# Altium PCB warship_demo_PCB.PcbDoc (part 1 of 3)
Units mm, origin at the board's own origin, x right, y up, seen from the top; angles counter-clockwise.
Board outline 160.38 x 121.38 mm, 2 copper layers (Top Layer, Bottom Layer); 272 components, 249 nets, 1200 pads, 295 vias.
Unrouted connection lines stored in the file: 2.
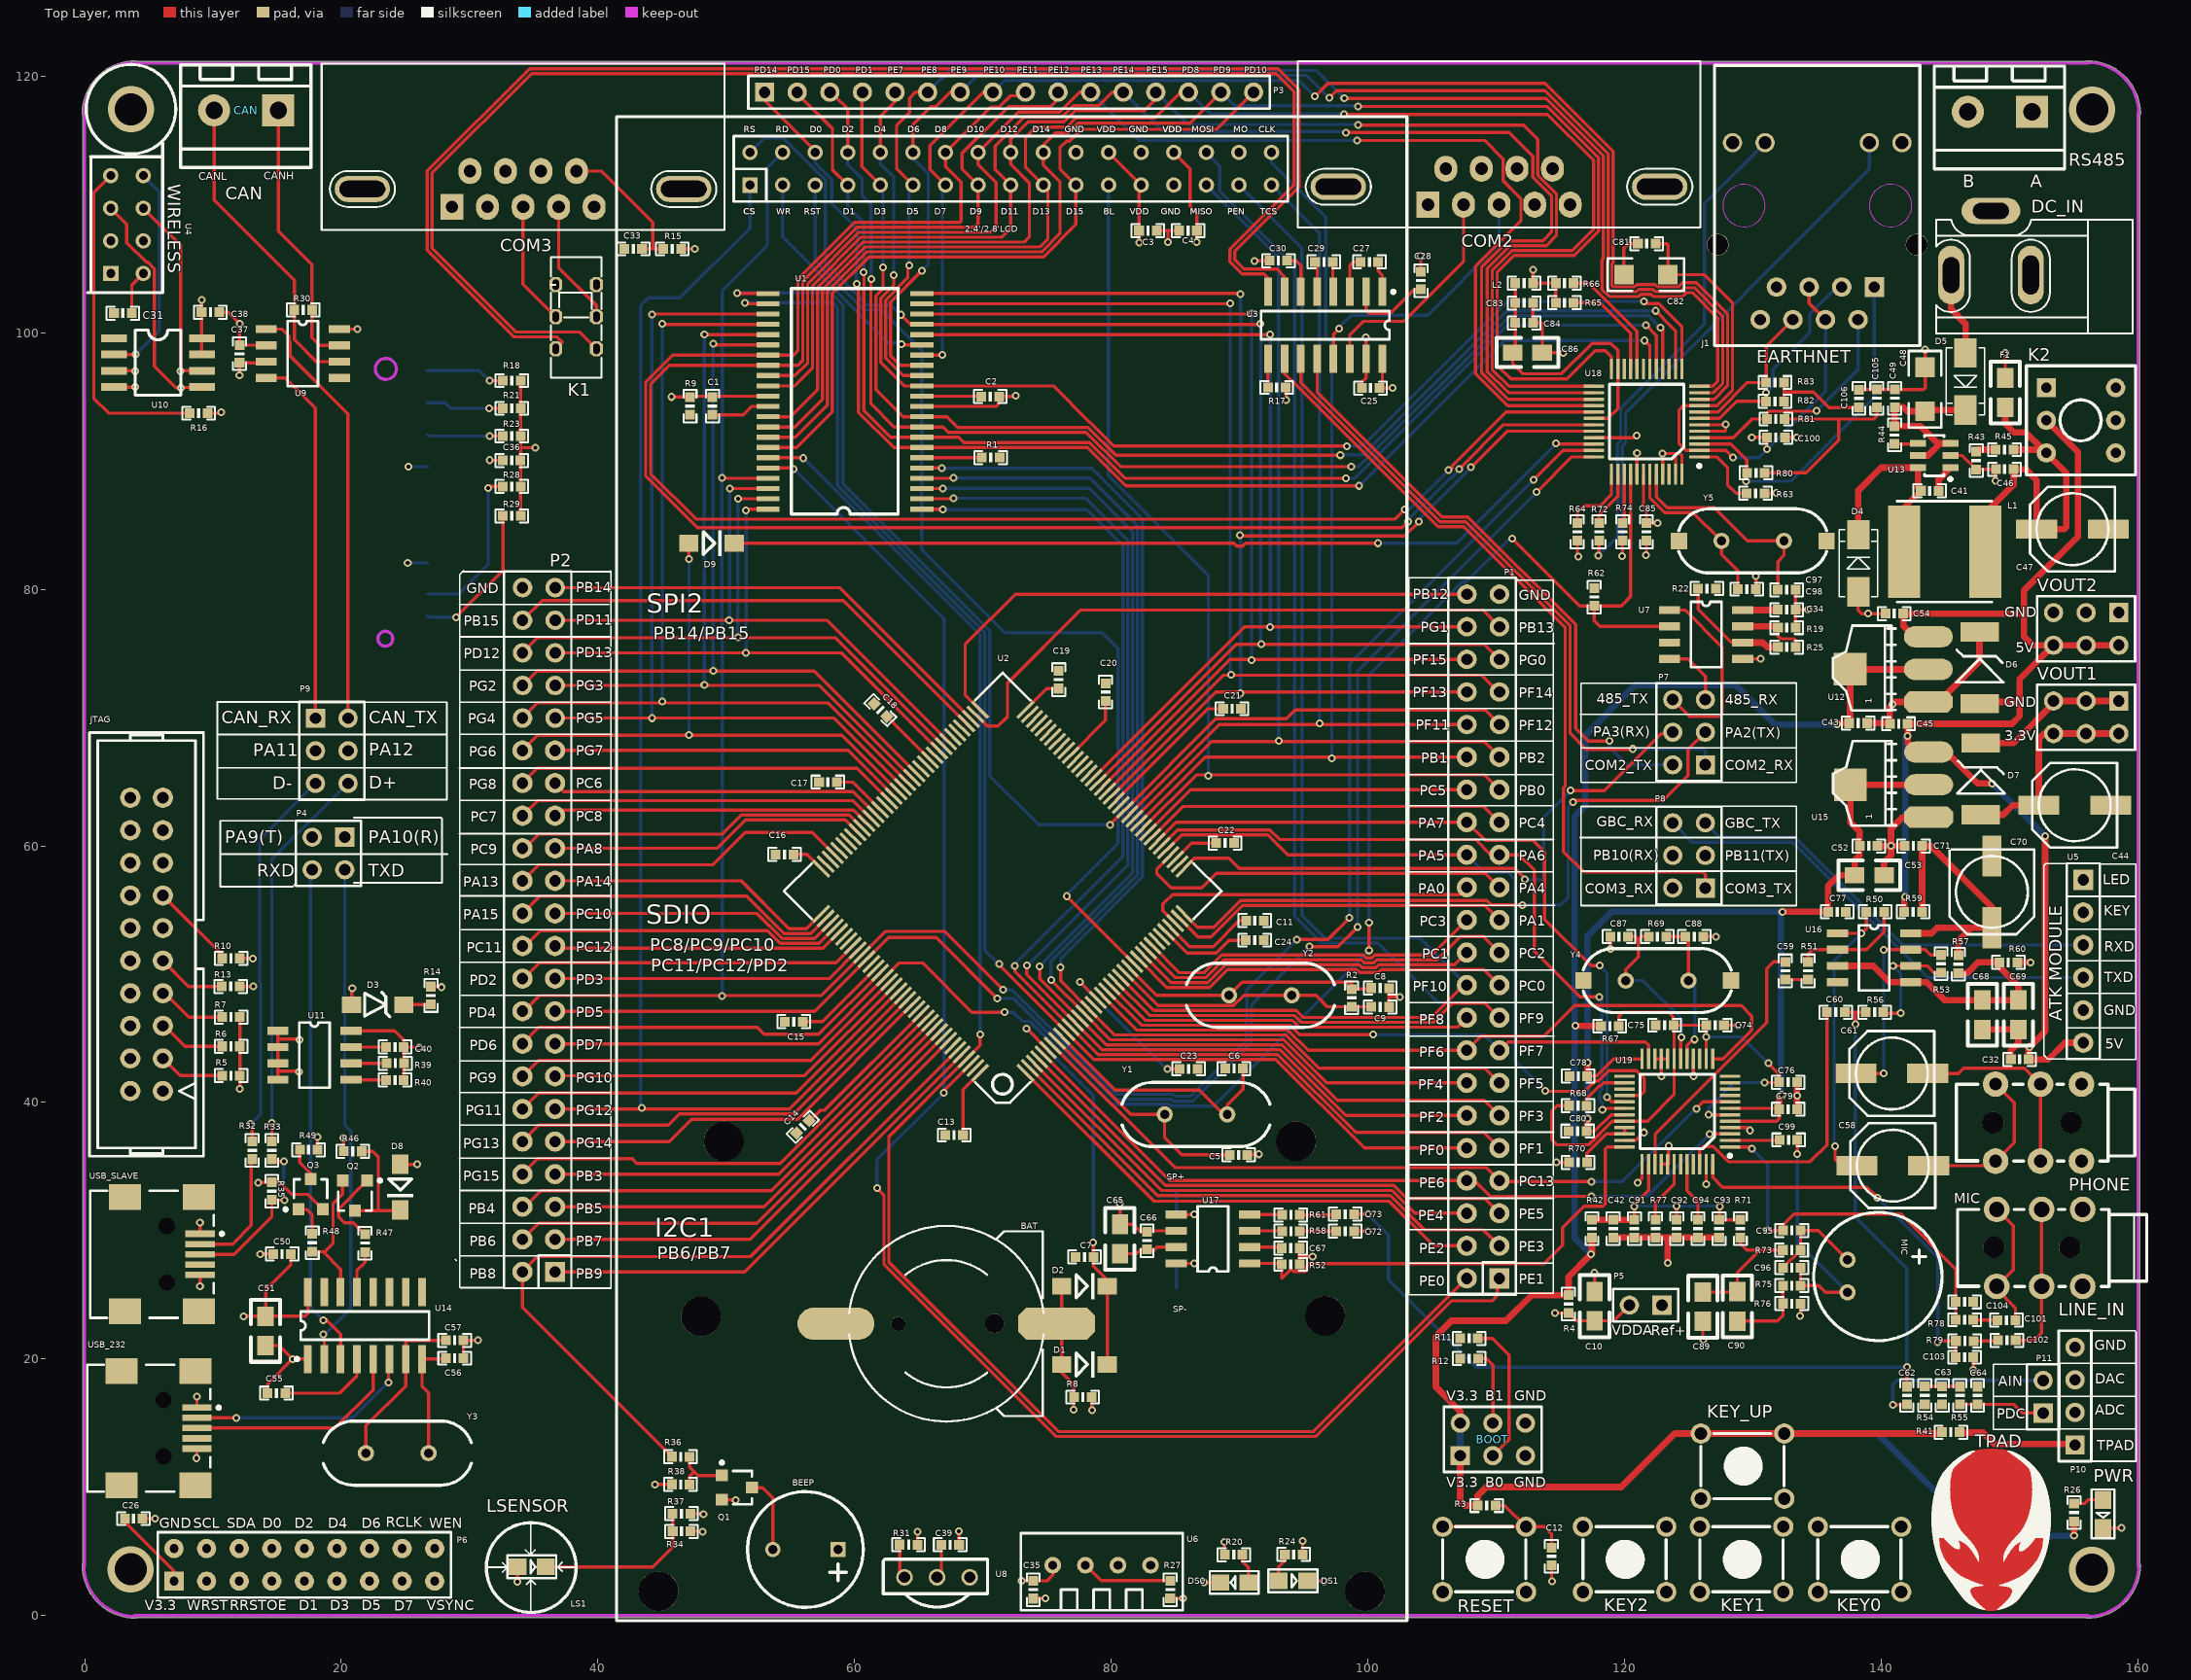
[diagram p0: Top Layer view]
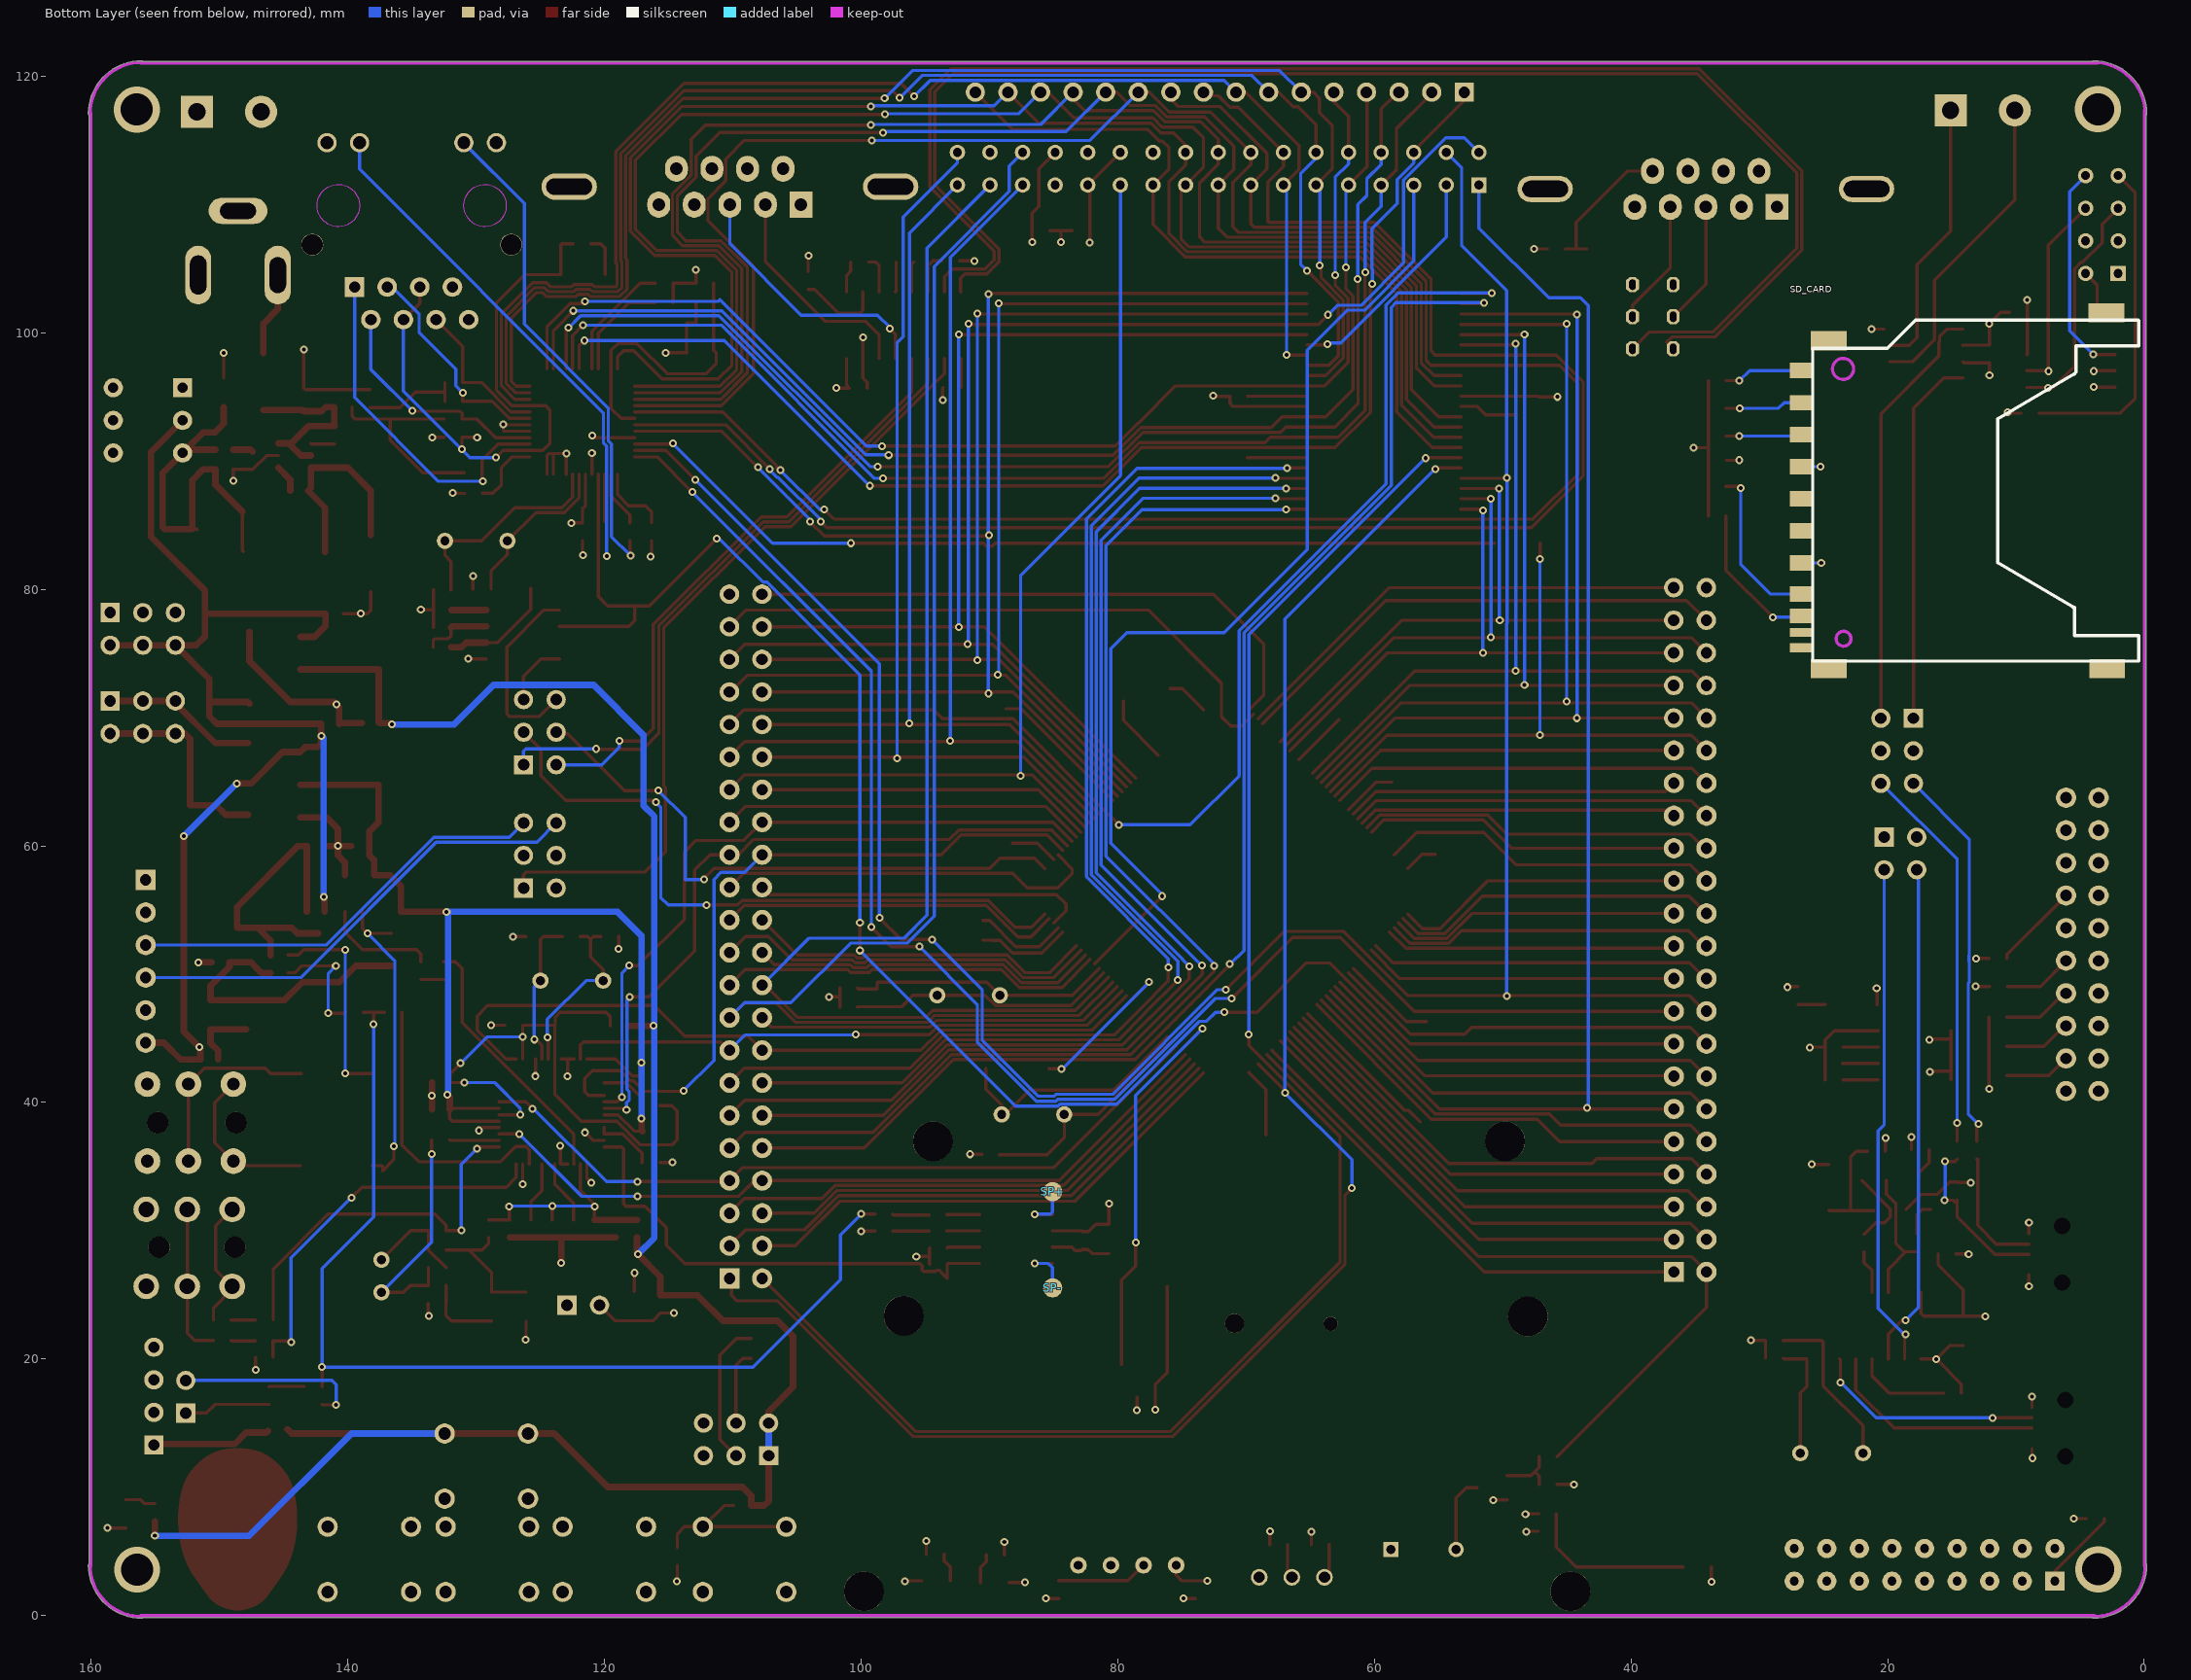
[diagram p1: Bottom Layer view, seen from below]

## Layer stack, top to bottom
Top Solder: solder mask 0.0102, Solder Resist, Dk 3.5
Top Layer: signal copper 0.0356
Dielectric 1: dielectric 0.32, FR-4, Dk 4.8
Bottom Layer: signal copper 0.0356
Bottom Solder: solder mask 0.0102, Solder Resist, Dk 3.5

## Board outline
-0.19,3.937 cw(c-0.063,3.937) -0.127,4.047 -0.127,116.953 cw(c-0.063,117.063) -0.19,117.063 cw(c3.937,117.063) 3.937,121.19 cw(c3.937,121.063) 4.047,121.127 155.953,121.127 cw(c156.063,121.063) 156.063,121.19 cw(c156.063,117.063) 160.19,117.063 cw(c160.063,117.063) 160.127,116.953 160.127,4.047 cw(c160.063,3.937) 160.19,3.937 cw(c156.063,3.937) 156.063,-0.19 cw(c156.063,-0.063) 155.953,-0.127 4.047,-0.127 cw(c3.937,-0.063) 3.937,-0.19 cw(c3.937,3.937)

## Design rules (kind name [scope] priority, off if disabled: settings)
Clearance [All] p1: gap=0.127 ignorepadtopadclearanceinfootprint=TRUE except(0: Arc-Hole Track-Hole SMDPad-Hole THPad-Hole Via-Hole Fill-Hole Poly-Hole Region-Hole Text-Hole; 0.051: Arc-SMDPad Arc-THPad Track-SMDPad Track-THPad SMDPad-SMDPad SMDPad-THPad THPad-THPad)
PlaneConnect [All] p1: planeconnectstyle=Direct reliefexpansion=0.508 reliefentries=4 reliefconductorwidth=0.254 reliefairgap=0.254
PolygonConnect [All] p1: connectstyle=Direct reliefconductorwidth=0.254 reliefentries=4 polygonreliefangle="90 Angle" airgapwidth=0.254
RoutingVias [All] p1: holewidth=0.305 width=0.61 viastyle="Through Hole" minholewidth=0.152 minwidth=0.152 maxholewidth=0.508 maxwidth=0.762
SolderMaskExpansion [All] p1: expansion=0.102
Width power [InNetClass('PWR')] p1: maxlimit=1.27 minlimit=0.254 preferedwidth=0.508
Width signal [All] p2: maxlimit=0.762 minlimit=0.254 preferedwidth=0.254
29 further rules are at their usual default settings.

## Classes and differential pairs
component class warship_demo_4: C41 C42 C43 C44 C45 C46 C47 C48 C49 C50 C51 C52 C53 C54 C55 C56 C57 D4 D5 D6 D7 D8 DC_IN F1 K2 L1 Q2 Q3 R42 R43 R44 R45 R46 R47 R48 R49 U12 U13 U14 U15 USB_232 VOUT1 VOUT2 Y3
component class warship_demo_3: BEEP C25 C26 C27 C28 C29 C30 C31 C32 C33 C34 C35 C36 C37 C38 C39 C40 CAN COM2 COM3 D3 DS0 DS1 K1 KEY0 KEY1 KEY2 KEY_UP LS1 P6 P7 P8 P9 P10 PWR Q1 R14 R15 R16 R17 R18 R19 R20 R21 R22 R23 R24 R25 R26 R27 R28 R29 R30 R31 R32 R33 R34 R35 R36 R37 R38 R39 R40 R41 RS485 SD_CARD TPAD U3 U4 U5 U6 U7 U8 U9 U10 U11 USB_SLAVE
component class warship_demo_2: 2.4'/2.8'LCD BAT BOOT C1 C2 C3 C4 C5 C6 C7 C8 C9 C10 C11 C12 C13 C14 C15 C16 C17 C18 C19 C20 C21 C22 C23 C24 D1 D2 JTAG P1 P2 P3 P4 P5 R1 R2 R3 R4 R5 R6 R7 R8 R9 R10 R11 R12 R13 RESET U1 U2 Y1 Y2
component class warship_demo_1: C58 C59 C60 C61 C62 C63 C64 C65 C66 C67 C68 C69 C70 C71 C72 C73 C74 C75 C76 C77 C78 C79 C80 C81 C82 C83 C84 C85 C86 C87 C88 C89 C90 C91 C92 C93 C94 C95 C96 C97 C98 C99 C100 C101 C102 C103 C104 C105 C106 D9 J1 L2 LINE_IN MIC P11 PHONE R50 R51 R52 R53 R54 R55 R56 R57 R58 R59 R60 R61 R62 R63 R64 R65 R66 R67 R68 R69 R70 R71 R72 R73 R74 R75 R76 R77 R78 R79 R80 R81 R82 R83 SP+ SP- U16 U17 U18 U19 Y4 Y5
net class PWR: AVDD CVDD GND NetC41_1 NetC41_2 NetC48_2 NetD5_1 VBTN VCC2.5 VCC3.3 VCC3.3M VCC5 VDDAMP VREF+ VUSB

## Components (designator, comment, footprint, x,y, rotation, side; value= is the part's Value field where it differs from the comment)
2.4'/2.8'LCD "TFT_LCD" db2*17-4.3 51.843,111.5 r0 top locked
BAT "BATT" BATM 67.141,22.758 r90 top locked
BEEP "BEEP" BELL-5 58.699,5.156 r180 top
BOOT "Header 3X2" HDR2X3 107.188,12.471 r0 top
C1 "104" 0603P 48.92,94.285 r90 top
C2 "104" 0603P 70.561,95.021 r180 top
C3 "104" 0603P 82.855,107.95 r180 top
C4 "104" 0603P 85.979,107.95 r180 top
C5 "10" 0603P 89.916,35.916 r180 top
C6 "10" 0603P 89.56,42.647 r0 top
C7 "104" 0603P 77.902,27.965 r0 top
C8 "22" 0603P 100.952,48.919 r180 top
C9 "22" 0603P 100.94,47.447 r0 top
C10 "10uF" 0805 117.654,25.273 r270 top
C11 "104" 0603P 91.186,54.178 r0 top
C12 "104" 0603P 114.3,4.623 r270 top
C13 "104" 0603P 67.742,37.465 r0 top
C14 "104" 0603P 55.956,38.1 r45 top
C15 "104" 0603P 55.245,46.304 r0 top
C16 "104" 0603P 54.534,59.334 r0 top
C17 "104" 0603P 57.912,64.973 r0 top
C18 "104" 0603P 62.001,70.587 r315 top
C19 "104" 0603P 75.897,72.962 r270 top
C20 "104" 0603P 79.553,71.984 r270 top
C21 "104" 0603P 89.408,70.688 r180 top
C22 "104" 0603P 88.875,60.223 r180 top
C23 "104" 0603P 86.03,42.621 r180 top
C24 "104" 0603P 91.186,52.654 r180 top
C25 "104" 0603P 100.203,95.682 r0 top
C26 "104" 0603P 3.81,7.569 r0 top
C27 "104" 0603P 100.101,105.512 r180 top
C28 "104" 0603P 104.115,104.064 r90 top
C29 "104" 0603P 96.571,105.512 r180 top
C30 "104" 0603P 93.015,105.613 r180 top
C31 "104" 0603P 2.972,101.524 r0 top
C32 "104" 0603P 150.774,43.358 r0 top
C33 "104" 0603P 42.748,106.528 r180 top
C34 "104" 0603P 132.626,78.41 r180 top
C35 "104" 0603P 73.914,2.032 r270 top
C36 "104" 0603P 33.274,90.043 r180 top
C37 "104" 0603P 12.065,98.349 r270 top
C38 "104" 0603P 9.804,101.6 r180 top
C39 "104" 0603P 67.437,5.537 r0 top
C40 "104" 0603P 24.181,44.323 r180 top
C41 "103" 0603P 143.764,87.681 r0 top
C42 "104" 0603P 119.099,30.162 r90 top
C43 "104" 0603P 138.201,69.571 r180 top
C44 "220uF" CC6.56.5 155.067,63.17 r0 top locked
C45 "104" 0603P 141.351,69.52 r0 top
C46 "104" 0603P 149.606,89.357 r0 top
C47 "220uF" CC6.56.5 154.889,84.684 r0 top
C48 "10uF" 1206 143.408,97.307 r270 top
C49 "104" 0603P 141.046,94.894 r270 top
C50 "104" 0603P 15.38,28.192 r180 top
C51 "10uF" 0805 14.097,21.057 r90 top
C52 "104" 0603P 139.014,59.995 r180 top
C53 "10uF" 0805 140.208,57.707 r180 top
C54 "104" 0603P 141.008,78.107 r0 top
C55 "104" 0603P 14.935,17.348 r0 top
C56 "22" 0603P 28.829,20.066 r180 top
C57 "22" 0603P 28.829,21.463 r180 top
C58 "220uF" CC6.56.5 140.894,35.077 r0 top
C59 "1uF" 0603P 132.51,50.267 r90 top
C60 "1uF" 0603P 136.455,47.039 r180 top
C61 "220uF" CC6.56.5 140.818,42.266 r0 top
C62 "1uF" 0603P 141.988,17.17 r270 top
C63 "102" 0603P 144.743,17.17 r90 top
C64 "101" 0603P 147.498,17.17 r270 top
C65 "10uF" 0805 80.672,30.505 r270 top
C66 "104" 0603P 82.779,29.235 r90 top
C67 "1uF" 0603P 93.98,28.651 r180 top
C68 "10uF" 0805 147.879,45.695 r90 top
C69 "10uF" 0805 150.673,45.695 r90 top
C70 "220uF" CC6.56.5 148.615,56.413 r90 top
C71 "104" 0603P 142.494,59.995 r180 top
C72 "104" 0603P 98.222,29.972 r180 top
C73 "1uF" 0603P 98.222,31.293 r180 top
C74 "104" 0603P 127.051,46.025 r180 top
C75 "104" 0603P 123.114,46.025 r0 top
C76 "104" 0603P 132.74,41.58 r180 top
C77 "104" 0603P 136.55,54.864 r180 top
C78 "104" 0603P 116.383,42.062 r0 top
C79 "104" 0603P 132.74,39.472 r180 top
C80 "104" 0603P 116.332,37.77 r0 top
C81 "104" 0603P 121.717,106.934 r0 top
C82 "100uF" 1206 119.939,104.521 r0 top
C83 "104" 0603P 112.166,102.311 r180 top
C84 "104" 0603P 112.166,100.762 r180 top
C85 "104" 0603P 121.691,84.48 r90 top
C86 "10uF" 0805 113.563,98.449 r180 top
C87 "22" 0603P 119.558,52.934 r0 top
C88 "22" 0603P 125.412,52.935 r0 top
C89 "10uF" 0805 126.084,22.936 r90 top
C90 "10uF" 0805 128.776,22.962 r90 top
C91 "104" 0603P 120.75,30.162 r90 top
C92 "104" 0603P 124.053,30.162 r90 top
C93 "104" 0603P 127.355,30.162 r90 top
C94 "1uF" 0603P 125.704,30.162 r90 top
C95 "1uF" 0603P 133.02,30.021 r180 top
C96 "101" 0603P 133.02,27.126 r180 top
C97 "22" 0603P 129.515,80.01 r180 top
C98 "22" 0603P 132.626,79.958 r180 top
C99 "1uF" 0603P 132.766,37.084 r180 top
C100 "104" 0603P 131.775,91.846 r0 top
C101 "1uF" 0603P 149.758,23.038 r180 top
C102 "1uF" 0603P 149.784,21.463 r180 top
C103 "103" 0603P 146.482,20.142 r180 top
C104 "103" 0603P 146.482,24.46 r180 top
C105 "104" 0603P 139.649,94.894 r270 top
C106 "104" 0603P 138.252,94.869 r270 top
CAN "CAN" HEAD2L-0.8 15.088,117.323 r180 top
COM2 "USART_F()" DB9 110.211,109.982 r0 top locked
COM3 "USART_M()" DB9 34.163,109.804 r0 top
D1 "1N4148" DIODE_SOP 76.124,19.583 r0 top
D2 "1N4148" DIODE_SOP 76.124,25.679 r0 top
D3 "ZMM3V3" DIODE_ZMMx 22.835,47.623 r0 top
D4 "SS14" DIODE_3*5.3 138.201,82.093 r90 top
D5 "SS14" DIODE_3*5.3 146.558,96.139 r270 top
D6 "SMBJ5.0A" SMBJ 147.65,73.762 r90 top
D7 "SMBJ3.3A" SMBJ 147.752,65.1 r90 top
D8 "1N4148" DIODE_SOP 24.587,35.179 r270 top
D9 "1N4148" DIODE_SOP 47.066,83.591 r0 top
DC_IN "POWER" DC10B 156.083,108.814 r180 top locked
DS0 "LED1" SMDLED 90.679,2.589 r180 top
DS1 "LED1" SMDLED 93.039,2.719 r0 top
F1 "1000mA" 0805 149.658,96.469 r270 top
J1 "RJ45" HR911105A 135.001,109.908 r0 top locked
JTAG "JTAG" JTAG_20 4.826,52.324 r90 top
K1 "MSS-22D18" MSS-22D18-DIP 36.703,103.744 r0 top
K2 "BUTTON" BTN8.5*8.5 152.857,95.707 r0 top
KEY0 "KEY_UP" KEY_M 135.054,6.934 r0 top
KEY1 "KEY_UP" KEY_M 125.859,6.934 r0 top
KEY2 "KEY_UP" KEY_M 116.738,6.934 r0 top
KEY_UP "KEY_UP" KEY_M 125.936,14.199 r0 top
L1 "4.7uH" L_SOP74 148.107,82.931 r180 top
L2 "220R,2.0A,0.05DCR" 0603P 112.166,103.861 r180 top
LINE_IN "LINE_IN" PHONE_ST#1 147.975,25.66 r0 top locked
LS1 "LSENS" SMDLED 33.73,3.812 r0 top
MIC "MIC" MIC 137.356,27.748 r270 top
P1 "HEAD2*22" HEAD2*22 110.247,26.278 r90 top locked
P2 "HEAD2*22" HEAD2*22 36.663,26.786 r90 top locked
P3 "HEAD1*16" HDR1X16 52.984,118.745 r0 top locked
P4 "USART1" HDR2X2 20.269,60.681 r180 top locked
P5 "VREF_SEL" HDR1X2 122.911,24.206 r180 top
P6 "OV7670" HDR2X9 6.96,2.692 r0 top
P7 "RS232/RS485" HDR2X3 126.289,66.319 r90 top
P8 "RS232/BTCOM&GPS" HDR2X3 126.289,56.718 r90 top locked
P9 "RS232/RS485" HDR2X3 17.983,69.952 r270 top
P10 "Header 4" HDR1X4 155.092,13.31 r90 top
P11 "Header2" HDR1X2 152.603,15.799 r90 top
PHONE "PHONE_M" PHONE_ST#2 152.248,38.43 r0 top locked
PWR "SYS" SMDLED 157.278,9.043 r270 top
Q1 "S8050" SOT-23R 50.698,9.982 r270 top
Q2 "S8050" SOT-23R 21.057,32.868 r180 top
Q3 "S8550" SOT-23R 17.602,32.715 r0 top
R1 "10K" 0603P 70.587,90.272 r0 top
R2 "1M" 0603P 98.73,48.158 r270 top
R3 "10K" 0603P 109.245,8.585 r180 top
R4 "10R" 0603P 115.621,24.282 r90 top
R5 "10K" 0603P 11.405,42.088 r180 top
R6 "10K" 0603P 11.405,44.374 r180 top
R7 "10K" 0603P 11.405,46.66 r180 top
R8 "0R" 0603P 77.775,17.043 r0 top
R9 "0R" 0603P 47.168,94.285 r90 top
R10 "10K" 0603P 11.405,51.232 r180 top
R11 "10K" 0603P 107.874,21.615 r180 top
R12 "10K" 0603P 107.874,20.041 r0 top
R13 "10K" 0603P 11.379,49.047 r180 top
R14 "510" 0603P 26.975,48.336 r90 top
R15 "10R" 0603P 45.796,106.528 r180 top
R16 "1K" 0603P 8.89,93.726 r180 top
R17 "510" 0603P 92.888,95.733 r0 top
R18 "47K" 0603P 33.274,96.266 r0 top
R19 "360R" 0603P 132.626,77.014 r0 top
R20 "510" 0603P 89.535,4.75 r180 top
R21 "47K" 0603P 33.274,94.107 r0 top
R22 "360R" 0603P 126.416,80.061 r180 top
R23 "47K" 0603P 33.274,91.948 r0 top
R24 "510" 0603P 94.209,4.775 r0 top
R25 "120R" 0603P 132.626,75.489 r0 top
R26 "510" 0603P 155.016,8.052 r270 top
R27 "4.7K" 0603P 84.582,2.032 r90 top
R28 "47K" 0603P 33.274,88.011 r0 top
R29 "47K" 0603P 33.274,85.725 r0 top
R30 "120R" 0603P 17.018,101.778 r0 top
R31 "4.7K" 0603P 64.211,5.537 r180 top
R32 "10R" 0603P 13.056,36.271 r90 top
R33 "10R" 0603P 14.58,36.271 r90 top
R34 "47K" 0603P 46.507,6.579 r0 top
R35 "1.5K" 0603P 14.58,33.096 r90 top
R36 "1K" 0603P 46.444,12.397 r0 top
R37 "1K" 0603P 46.507,7.95 r180 top
R38 "10K" 0603P 46.444,10.238 r0 top
R39 "4.7K" 0603P 24.206,43.053 r180 top
R40 "4.7K" 0603P 24.181,41.758 r180 top
R41 "1M" 0603P 145.415,14.3 r180 top
R42 "10R" 0603P 117.448,30.162 r90 top
R43 "9.53K" 0603P 147.396,90.043 r270 top
R44 "100K" 0603P 141.021,92.024 r270 top
R45 "49.9K" 0603P 149.606,90.881 r180 top
R46 "10K" 0603P 20.879,36.195 r0 top
R47 "1K" 0603P 21.846,29.045 r270 top
R48 "1K" 0603P 17.729,29.058 r90 top
R49 "1K" 0603P 17.45,36.322 r0 top
R50 "10K" 0603P 139.51,54.864 r0 top
R51 "10K" 0603P 134.29,50.267 r90 top
R52 "10K" 0603P 93.967,27.383 r0 top
R53 "10K" 0603P 144.655,50.813 r270 top
R54 "4.7k" 0603P 143.383,17.17 r90 top
R55 "47k" 0603P 146.12,17.17 r270 top
R56 "10K" 0603P 139.471,47.039 r180 top
R57 "10K" 0603P 146.001,50.787 r270 top
R58 "10K" 0603P 93.993,29.974 r0 top
R59 "10R" 0603P 142.469,54.864 r0 top
R60 "10K" 0603P 149.885,50.927 r0 top
R61 "10K" 0603P 93.993,31.244 r0 top
R62 "10K" 0603P 117.627,79.4 r90 top
R63 "6.8K" 0603P 130.2,87.478 r180 top
R64 "10K" 0603P 116.308,84.48 r270 top
R65 "10K" 0603P 115.316,102.337 r0 top
R66 "10K" 0603P 115.316,103.861 r0 top
R67 "0R" 0603P 118.847,45.949 r180 top
R68 "100K" 0603P 116.357,39.751 r180 top
R69 "1M" 0603P 122.555,52.934 r0 top
R70 "100K" 0603P 116.357,35.33 r0 top
R71 "1K" 0603P 129.007,30.162 r90 top
R72 "510" 0603P 118.008,84.48 r90 top
R73 "1K" 0603P 133.02,28.499 r180 top
R74 "510" 0603P 119.837,84.48 r90 top
R75 "1K" 0603P 133.02,25.729 r180 top
R76 "1K" 0603P 133.02,24.332 r0 top
R77 "1K" 0603P 122.402,30.162 r90 top
R78 "510" 0603P 146.482,23.063 r180 top
R79 "510" 0603P 146.507,21.412 r180 top
R80 "49.9R" 0603P 130.226,89.078 r180 top
R81 "49.9R" 0603P 131.775,93.269 r180 top
R82 "49.9R" 0603P 131.724,94.64 r180 top
R83 "49.9R" 0603P 131.724,96.114 r180 top
RESET "KEY_M" KEY_M 105.816,6.934 r0 top
RS485 "RS485" HEAD2L-0.8 151.74,117.221 r180 top
SD_CARD "sd card" SDCARD_L 26.73,94.537 r90 bottom locked
SP+ "SPK+" TP-1.5 85.065,33.045 r90 top
SP- "SPK-" TP-1.5 85.065,25.552 r270 top
TPAD "ALIENTEK" ALIENTEK_PAD1 148.514,13.005 r0 top
U1 "IS62WV51216" TSOP44 65.233,86.253 r180 top locked
U2 "STM32F103ZET6" LQFP144 73.298,42.328 r135 top locked
U3 "SP3232" SOP16M 96.672,100.584 r180 top
U4 "WIRELESS" NRF24L01 4.572,104.623 r0 top
U5 "ATK MODULE" HEAD6 155.717,57.364 r270 top locked
U6 "DHT11&DS18B20" DHT11 75.438,3.937 r0 top locked
U7 "SP3485" SOP-8 123.495,78.384 r0 top
U8 "HS0038" HS0038 63.881,2.997 r0 top locked
U9 "TJA1050" SOP-8 14.14,100.281 r0 top
U10 "W25Q128" SOIC-8 2.286,99.57 r0 top
U11 "24C02" SOP-8 15.052,45.591 r0 top
U12 "AMS1117-3.3" AMS1117 143.661,71.221 r90 top
U13 "MP2359" SOT-23-6 145.39,89.474 r180 top
U14 "CH340G" SOP16M 21.844,22.606 r0 top
U15 "AMS1117-3.3" AMS1117 143.686,62.229 r90 top
U16 "TDA1308T" SOP-8 136.591,53.188 r0 top
U17 "HT6872" SOP-8 90.765,27.457 r180 top
U18 "DM9000" mTQFP48 121.59,91.618 r180 top locked
U19 "VS1053B" mTQFP48 123.977,37.846 r180 top
USB_232 "USB" USB/SM0.8-6H5 0.897,14.62 r180 top
USB_SLAVE "USB" USB/SM0.8-6H5 1.143,28.169 r180 top
VOUT1 "Header 3X2" HDR2X3 158.496,71.298 r180 top
VOUT2 "Header 3X2" HDR2X3 158.496,78.181 r180 top
Y1 "32.768K" XTAL_US#1 89.03,39.065 r180 top
Y2 "8MHz" XTAL_US#1 94.059,48.362 r180 top
Y3 "8MHz" XTAL_US#1 26.8,12.675 r180 top
Y4 "12.288MHz" XTAL_US#2 120.088,49.505 r0 top
Y5 "25MHz" XTAL_US#2 132.413,83.769 r180 top

## Footprints (in the part's own frame and the unit in brackets; to place one, negate y for a bottom-side part, rotate by r counter-clockwise, add the part's x,y. Pads: shape width x height; smd on the part's side, far side on the other; paste and mask are expansions set on the pad)
0603P [mil]
  rect 30x30 smd: 1(-27,0) 2(27.5,-0.06)
  silkscreen extent -50,-20 50,20
0805 [mil]
  rect 60x50 smd: 1(0,-0.06) 2(90,-0.06)
  silkscreen extent -50,-45 140,45
1206 [mil]
  rect 60x60 smd: 1(0,0) 2(135,0)
  silkscreen extent -50,-50 185,50
ALIENTEK_PAD1 [mm]
  Top Layer drawing of 922 lines, arcs and shapes, not listed
  silkscreen extent -4.6,-12.53 4.68,-0.13
AMS1117 [mil]
  oct 65x150 smd: 1(0.03,-0.06)
  oval 65x150 smd: 2(100.03,-0.06) 3(200.03,-0.06)
  rect 100x100 smd: 4(100.03,239.94)
  silkscreen extent -26,100 234,293
BATM [mm]
  round 1.1 hole 1.1 unplated: 0(0,3.748)
  round 1.5 hole 1.5 unplated: 0(0.025,-3.752)
  oct 2.5x6 smd: 1(0,-8.602)
  oval 2.5x6 smd: 2(0,8.598)
  silkscreen extent -7.62,-7.58 7.62,7.57
BELL-5 [mm]
  rect 1.2x1.2 hole 0.7: 1(0,0)
  round 1.2 hole 0.7: 2(5.08,0)
  silkscreen extent -1.97,-4.51 7.05,4.51
BTN8.5*8.5 [mm]
  rect 1.5x1.5 hole 0.8: 1(0,0)
  round 1.5 hole 0.8: 2(0,-2.54) 3(0,-5.08) 4(5.4,-5.08) 5(5.4,-2.54) 6(5.4,0)
  silkscreen extent -1.55,-6.79 6.95,1.71
CC6.56.5 [mm]
  rect 3.2x1.5 smd: 1(-2.794,0) 2(2.8,0)
  silkscreen extent -3.3,-3.3 3.3,3.3
db2*17-4.3 [mm]
  rect 1.2x1.2 hole 0.7: 1(-0.002,0.006)
  round 1.2 hole 0.7: 2(-0.002,2.546) 3(2.538,0.006) 4(2.538,2.546) 5(5.08,0) 6(5.078,2.546) 7(7.62,0) 8(7.62,2.54) 9(10.158,0.006) 10(10.158,2.546) 11(12.698,0.006) 12(12.698,2.546) 13(15.238,0.006) 14(15.238,2.546) 15(17.778,0.006) 16(17.778,2.546) 17(20.318,0.006) 18(20.318,2.546) 19(22.858,0.006) 20(22.858,2.546) 21(25.398,0.006) 22(25.398,2.546) 23(27.938,0.006) 24(27.938,2.546) 25(30.478,0.006) 26(30.478,2.546) 27(33.018,0.006) 28(33.018,2.546) 29(35.558,0.006) 30(35.558,2.546) 31(38.098,0.006) 32(38.098,2.546) 33(40.638,0.006) 34(40.638,2.546)
  round 3.1 hole 3.1: ""(-7.125,-109.596) ""(-3.81,-88.18) ""(-2.037,-74.525) ""(42.54,-74.525) ""(44.82,-88.12) ""(47.925,-109.596)
  silkscreen extent -10.4,-111.89 51.19,5.33
DB9 [mil]
  oval 170x80 hole 50 slot 140 at 0 deg: 0(-493,55) 0(493,55)
  rect 70x80 hole 38: 1(-218,0)
  oval 70x80 hole 38: 2(-109,0) 3(0,0) 4(109,0) 5(218,0) 6(-163,110) 7(-54,110) 8(55,110) 9(164,110)
  silkscreen extent -618,-70 618,440
DC10B [mil]
  oval 80x180 hole 50 slot 110 at 90 deg: 1(419.09,170)
  oval 80x180 hole 50 slot 120 at 90 deg: 2(175,170)
  oval 180x80 hole 50 slot 110 at 0 deg: 3(297.05,-26.85)
  silkscreen extent -138,0 465,350
DHT11 [mm]
  round 1.3 hole 0.7: 1(0,0) 2(2.54,0) 3(5.08,0) 4(7.62,0)
  silkscreen extent -2.5,-3.5 10.12,2.5
DIODE_3*5.3 [mm]
  rect 2.3x1.75 smd: 1(-2.286,0) 2(2.159,0)
  silkscreen extent -2.67,-1.5 2.54,1.5
DIODE_SOP [mm]
  rect 1.5x1.3 smd: 1(0,0) 2(3.556,0)
  silkscreen extent 1.14,-1.02 2.56,1.02
DIODE_ZMMx [mm]
  rect 1.5x1.3 smd: 1(-2.032,0) 2(2.032,0)
  silkscreen extent -1.02,-0.95 0.95,0.95
HDR1X2 [mm]
  rect 1.5x1.5 hole 0.9: 1(0,0)
  round 1.5 hole 0.9: 2(2.54,0)
  silkscreen extent -1.27,-1.27 3.81,1.27
HDR1X4 [mm]
  rect 1.5x1.5 hole 0.889: 1(0,0)
  round 1.5 hole 0.889: 2(2.54,0) 3(5.08,0) 4(7.62,0)
  silkscreen extent -1.27,-1.27 8.89,1.27
HDR1X16 [mm]
  rect 1.5x1.5 hole 0.9: 1(0,0)
  round 1.5 hole 0.9: 2(2.54,0) 3(5.08,0) 4(7.62,0) 5(10.16,0) 6(12.7,0) 7(15.24,0) 8(17.78,0) 9(20.32,0) 10(22.86,0) 11(25.4,0) 12(27.94,0) 13(30.48,0) 14(33.02,0) 15(35.56,0) 16(38.1,0)
  silkscreen extent -1.27,-1.27 39.37,1.27
HDR2X2 [mm]
  rect 1.5x1.5 hole 0.9: 1(0,0)
  round 1.5 hole 0.9: 2(0,2.54) 3(2.54,0) 4(2.54,2.54)
  silkscreen extent -1.27,-1.27 3.81,3.81
HDR2X3 [mm]
  rect 1.5x1.5 hole 0.9: 1(0,0)
  round 1.5 hole 0.9: 2(0,2.54) 3(2.54,0) 4(2.54,2.54) 5(5.08,0) 6(5.08,2.54)
  silkscreen extent -1.27,-1.27 6.35,3.81
HDR2X9 [mm]
  rect 1.5x1.5 hole 0.7: 1(0,0)
  round 1.5 hole 0.7: 2(0,2.54) 3(2.54,0) 4(2.54,2.54) 5(5.08,0) 6(5.08,2.54) 7(7.62,0) 8(7.62,2.54) 9(10.16,0) 10(10.16,2.54) 11(12.7,0) 12(12.7,2.54) 13(15.24,0) 14(15.24,2.54) 15(17.78,0) 16(17.78,2.54) 17(20.32,0) 18(20.32,2.54)
  silkscreen extent -1.27,-1.27 21.59,3.81
HEAD2*22 [mil]
  rect 62x62 hole 35: 1(0.43,0.42)
  round 62 hole 35: 2(0.43,100.42) 3(100.43,0.42) 4(100.43,100.42) 5(200.43,0.42) 6(200.43,100.42) 7(300.43,0.42) 8(300.43,100.42) 9(400.43,0.42) 10(400.43,100.42) 11(500.43,0.42) 12(500.43,100.42) 13(600.43,0.42) 14(600.43,100.42) 15(700.43,0.42) 16(700.43,100.42) 17(800.43,0.42) 18(800.43,100.42) 19(900.43,0.42) 20(900.43,100.42) 21(1000.43,0.42) 22(1000.43,100.42) 23(1100.43,0.42) 24(1100.43,100.42) 25(1200.43,0.42) 26(1200.43,100.42) 27(1300.43,0.42) 28(1300.43,100.42) 29(1400.43,0.42) 30(1400.43,100.42) 31(1500.43,0.42) 32(1500.43,100.42) 33(1600.43,0.42) 34(1600.43,100.42)
  round 60 hole 35: 35(1700,0) 36(1700,100) 37(1800,0) 38(1800,100) 39(1900,0) 40(1900,100) 41(2000,0) 42(2000,100) 43(2100,0) 44(2100,100)
  silkscreen extent -50,-50 2150,157
HEAD2L-0.8 [mm]
  rect 2.5x2.5 hole 1.35: 1(0,0)
  round 2.5 hole 1.35: 2(5,0)
  silkscreen extent -2.54,-3.56 7.62,4.45
HEAD6 [mil]
  rect 62x62 hole 35: 1(0.43,0.42)
  round 62 hole 35: 2(100.43,0.42) 3(200.43,0.42) 4(300.43,0.42) 5(400.43,0.42) 6(500.43,0.42)
  silkscreen extent -50,-50 550,51
HR911105A [mm]
  rect 1.524x1.524 hole 0.889: 1(4.45,-6.35)
  round 1.524 hole 0.889: 2(3.18,-8.89) 3(1.91,-6.35) 4(0.64,-8.89) 5(-0.63,-6.35) 6(-1.9,-8.89) 7(-3.17,-6.35) 8(-4.44,-8.89)
  round 1.5 hole 1.02: 9(6.6,4.9) 10(4.064,4.9) 11(-4.064,4.9) 12(-6.6,4.9)
  round 1.7 hole 1.65: 13(7.75,-3.048) 14(-7.75,-3.048)
  Keep-Out Layer circle w0.051: c5.716,0 r1.65
  Keep-Out Layer circle w0.051: c-5.714,0 r1.65
  silkscreen extent -8,-10.92 8,10.92
HS0038 [mm]
  round 1.3 hole 0.889: 1(0,0) 2(2.54,0) 3(5.08,0)
  silkscreen extent -1.65,-2.32 6.48,1.4
JTAG_20 [mil]
  round 62 hole 35: 1(-450,-50) 2(-450,50) 3(-350,-50) 4(-350,50) 5(-250,-50) 6(-250,50) 7(-150,-50) 8(-150,50) 9(-50,-50) 10(-50,50) 11(50,-50) 12(50,50) 13(150,-50) 14(150,50) 15(250,-50) 16(250,50) 17(350,-50) 18(350,50) 19(450,-50) 20(450,50)
  silkscreen extent -650,-175 650,175
KEY_M [mil]
  round 62 hole 38: 1(0,0) 1(255.91,0) 2(0,-200) 2(255.91,-200)
  silkscreen extent 0,-200 255,0
L_SOP74 [mm]
  rect 2.5x7.2 smd: 1(0,0) 2(6.35,0)
  silkscreen extent -0.51,-3.94 6.89,3.94
LQFP144 [mm]
  rect 1.8x0.254 smd: 1(-0.009,0.001) 2(-0.009,-0.499) 3(-0.009,-0.999) 4(-0.009,-1.499) 5(-0.009,-1.999) 6(-0.009,-2.499) 7(-0.009,-2.999) 8(-0.009,-3.499) 9(-0.009,-3.999) 10(-0.009,-4.499) 11(-0.009,-4.999) 12(-0.009,-5.499) 13(-0.009,-5.999) 14(-0.009,-6.499) 15(-0.009,-6.999) 16(-0.009,-7.499) 17(-0.009,-7.999) 18(-0.009,-8.499) 19(-0.009,-8.999) 20(-0.009,-9.499) 21(-0.009,-9.999) 22(-0.009,-10.499) 23(-0.009,-10.999) 24(-0.009,-11.499) 25(-0.009,-11.999) 26(-0.009,-12.499) 27(-0.009,-12.999) 28(-0.009,-13.499) 29(-0.009,-13.999) 30(-0.009,-14.499) 31(-0.009,-14.999) 32(-0.009,-15.499) 33(-0.009,-15.999) 34(-0.009,-16.499) 35(-0.009,-16.999) 36(-0.009,-17.499) 73(22.491,-17.499) 74(22.491,-16.999) 75(22.491,-16.499) 76(22.491,-15.999) 77(22.491,-15.499) 78(22.491,-14.999) 79(22.491,-14.499) 80(22.491,-13.999) 81(22.491,-13.499) 82(22.491,-12.999) 83(22.491,-12.499) 84(22.491,-11.999) 85(22.491,-11.499) 86(22.491,-10.999) 87(22.491,-10.499) 88(22.491,-9.999) 89(22.491,-9.499) 90(22.491,-8.999) 91(22.491,-8.499) 92(22.491,-7.999) 93(22.491,-7.499) 94(22.491,-6.999) 95(22.491,-6.499) 96(22.491,-5.999) 97(22.491,-5.499) 98(22.491,-4.999) 99(22.491,-4.499) 100(22.491,-3.999) 101(22.491,-3.499) 102(22.491,-2.999) 103(22.491,-2.499) 104(22.491,-1.999) 105(22.491,-1.499) 106(22.491,-0.999) 107(22.491,-0.499) 108(22.491,0.001)
  rect 0.254x1.8 smd: 37(2.491,-19.999) 38(2.991,-19.999) 39(3.491,-19.999) 40(3.991,-19.999) 41(4.491,-19.999) 42(4.991,-19.999) 43(5.491,-19.999) 44(5.991,-19.999) 45(6.491,-19.999) 46(6.991,-19.999) 47(7.491,-19.999) 48(7.991,-19.999) 49(8.491,-19.999) 50(8.991,-19.999) 51(9.491,-19.999) 52(9.991,-19.999) 53(10.491,-19.999) 54(10.991,-19.999) 55(11.491,-19.999) 56(11.991,-19.999) 57(12.491,-19.999) 58(12.991,-19.999) 59(13.491,-19.999) 60(13.991,-19.999) 61(14.491,-19.999) 62(14.991,-19.999) 63(15.491,-19.999) 64(15.991,-19.999) 65(16.491,-19.999) 66(16.991,-19.999) 67(17.491,-19.999) 68(17.991,-19.999) 69(18.491,-19.999) 70(18.991,-19.999) 71(19.491,-19.999) 72(19.991,-19.999) 109(19.991,2.501) 110(19.491,2.501) 111(18.991,2.501) 112(18.491,2.501) 113(17.991,2.501) 114(17.491,2.501) 115(16.991,2.501) 116(16.491,2.501) 117(15.991,2.501) 118(15.491,2.501) 119(14.991,2.501) 120(14.491,2.501) 121(13.991,2.501) 122(13.491,2.501) 123(12.991,2.501) 124(12.491,2.501) 125(11.991,2.501) 126(11.491,2.501) 127(10.991,2.501) 128(10.491,2.501) 129(9.991,2.501) 130(9.491,2.501) 131(8.991,2.501) 132(8.491,2.501) 133(7.991,2.501) 134(7.491,2.501) 135(6.991,2.501) 136(6.491,2.501) 137(5.991,2.501) 138(5.491,2.501) 139(4.991,2.501) 140(4.491,2.501) 141(3.991,2.501) 142(3.491,2.501) 143(2.991,2.501) 144(2.491,2.501)
  silkscreen extent -0.81,-20.8 23.29,3.3
MIC [mil]
  round 50 hole 28: 1(0.42,0.29) 2(100.42,0.29)
  silkscreen extent -145,-103 248,290
MSS-22D18-DIP [mm]
  oct 1x1.2 hole 0.5 slot 0.8 at 90 deg: 1(0,0) 2(3.175,0) 3(0,-2.5) 4(3.175,-2.5) 5(0,-5) 6(3.175,-5)
  silkscreen extent -0.38,-7.24 3.56,2.16
mTQFP48 [mm]
  rect 1.6x0.254 smd: 1(-4.223,1.3) 2(-4.223,0.8) 3(-4.223,0.3) 4(-4.223,-0.2) 5(-4.223,-0.7) 6(-4.223,-1.2) 7(-4.223,-1.7) 8(-4.223,-2.2) 9(-4.223,-2.7) 10(-4.223,-3.2) 11(-4.223,-3.7) 12(-4.223,-4.2) 25(3.977,-4.2) 26(3.977,-3.7) 27(3.977,-3.2) 28(3.977,-2.7) 29(3.977,-2.2) 30(3.977,-1.7) 31(3.977,-1.2) 32(3.977,-0.7) 33(3.977,-0.2) 34(3.977,0.3) 35(3.977,0.8) 36(3.977,1.3)
  rect 0.254x1.6 smd: 13(-2.873,-5.55) 14(-2.373,-5.55) 15(-1.873,-5.55) 16(-1.373,-5.55) 17(-0.873,-5.55) 18(-0.373,-5.55) 19(0.127,-5.55) 20(0.627,-5.55) 21(1.127,-5.55) 22(1.627,-5.55) 23(2.127,-5.55) 24(2.627,-5.55) 37(2.627,2.65) 38(2.127,2.65) 39(1.627,2.65) 40(1.127,2.65) 41(0.627,2.65) 42(0.127,2.65) 43(-0.373,2.65) 44(-0.873,2.65) 45(-1.373,2.65) 46(-1.873,2.65) 47(-2.373,2.65) 48(-2.873,2.65)
  silkscreen extent -4.35,-4.35 2.78,2.12
NRF24L01 [mm]
  round 1.2 hole 0.7: 1(0,0) 3(0,2.54) 4(-2.54,2.54) 5(0,5.08) 6(-2.54,5.08) 7(0,7.62) 8(-2.54,7.62)
  rect 1.2x1.2 hole 0.7: 2(-2.54,0)
  silkscreen extent -4.32,-1.5 1.5,10.16
PHONE_ST#1 [mm]
  round 1.676 hole 1.676: 0(0.811,3.067) 0(6.711,3.067)
  round 2 hole 1.2: 1(1.011,0.007) 1(1.011,6.007) 2(4.511,0.007) 2(4.511,6.007) 3(7.711,0.007) 3(7.711,6.007)
  silkscreen extent -2.03,0 12.7,6.01
PHONE_ST#2 [mm]
  round 1.676 hole 1.676: 0(-3.556,0) 0(2.54,0)
  round 2 hole 1: 1(-3.35,-3) 1(-3.35,3) 2(0.15,-3) 2(0.15,3) 3(3.35,-3) 3(3.35,3)
  silkscreen extent -6.39,-3.01 7.49,3
SDCARD_L [mm]
  rect 1.2x1.8 smd: 1(0,0) 2(-2.489,0) 3(-4.983,-0.009) 4(-7.483,-0.009) 5(-9.983,-0.009) 6(-12.483,-0.009) 7(-14.908,-0.009) 9(2.517,-0.009)
  rect 1.1x1.8 smd: 8(-16.612,0)
  rect 0.7x1.8 smd: 10(-17.908,-0.009) 12(-19.101,0)
  rect 1.5x2.8 smd: 11(-20.726,-23.834) 11(-20.726,-2.143) 11(4.826,-2.143) 11(7.01,-23.784)
  Keep-Out Layer circle w0.254: c-18.39,-3.3 r0.58
  Keep-Out Layer circle w0.254: c2.642,-3.26 r0.82
  silkscreen extent -20.13,-26.3 6.44,-0.9
SMBJ [mm]
  rect 1.5x3 smd: 1(-2.667,0) 2(2.921,0)
  silkscreen extent -1.02,-1.85 1.52,1.83
SMDLED [mm]
  rect 1.4x1.27 smd: 1(0.001,-0.002) 2(2.211,-0.002)
  silkscreen extent -0.8,-0.89 3.01,0.89
SOIC-8 [mil]
  rect 80x24 smd: 1(0,0) 2(0,-50.06) 3(0,-100.06) 4(0,-150.06) 5(270,-150) 6(270,-100) 7(270,-50) 8(270,0)
  silkscreen extent 65,-175 205,25
SOP16M [mm]
  rect 0.6x2.2 smd: 1(-4.445,-2.6) 2(-3.175,-2.6) 3(-1.905,-2.6) 4(-0.635,-2.6) 5(0.635,-2.6) 6(1.905,-2.6) 7(3.175,-2.6) 8(4.445,-2.6) 9(4.445,2.6) 10(3.175,2.6) 11(1.905,2.6) 12(0.635,2.6) 13(-0.635,2.6) 14(-1.905,2.6) 15(-3.175,2.6) 16(-4.445,2.6)
  silkscreen extent -5.42,-2.72 5,1.1
SOP-8 [mil]
  rect 65x25 smd: 1(0,0) 2(0,-50) 3(0,-100) 4(0,-150) 5(224.41,-150) 6(224.41,-100) 7(224.41,-50) 8(224.41,0)
  silkscreen extent 65,-175 159,25
SOT-23-6 [mil]
  rect 50x20 smd: 1(0,0) 2(0,-37.4) 3(0,-74.8) 4(100,-74.8) 5(100,-37.4) 6(100,0)
  silkscreen extent 0,-99 80,35
SOT-23R [mm]
  rect 0.9x0.95 smd: 1(0.95,-1.048) 2(-0.95,-1.048) 3(0,1.302)
  silkscreen extent -2.07,-1.17 1.3,1.3
TP-1.5 [mm]
  round 1.5 smd far side: 1(0,0)
TSOP44 [mm]
  rect 1.8x0.4 smd: 1(-0.009,0.001) 2(-0.009,-0.799) 3(-0.009,-1.599) 4(-0.009,-2.399) 5(-0.009,-3.199) 6(-0.009,-3.999) 7(-0.009,-4.799) 8(-0.009,-5.599) 9(-0.009,-6.399) 10(-0.009,-7.199) 11(-0.009,-7.999) 12(-0.009,-8.799) 13(-0.009,-9.599) 14(-0.009,-10.399) 15(-0.009,-11.199) 16(-0.009,-11.999) 17(-0.009,-12.799) 18(-0.009,-13.599) 19(-0.009,-14.399) 20(-0.009,-15.199) 21(-0.009,-15.999) 22(-0.009,-16.799) 23(11.991,-16.799) 24(11.991,-15.999) 25(11.991,-15.199) 26(11.991,-14.399) 27(11.991,-13.599) 28(11.991,-12.799) 29(11.991,-11.999) 30(11.991,-11.199) 31(11.991,-10.399) 32(11.991,-9.599) 33(11.991,-8.799) 34(11.991,-7.999) 35(11.991,-7.199) 36(11.991,-6.399) 37(11.991,-5.599) 38(11.991,-4.799) 39(11.991,-3.999) 40(11.991,-3.199) 41(11.991,-2.399) 42(11.991,-1.599) 43(11.991,-0.799) 44(11.991,0.001)
  silkscreen extent 1.83,-17.2 10.16,0.4
USB/SM0.8-6H5 [mm]
  rect 2.3x0.5 smd: 1(-7.85,-1.6) 2(-7.85,-0.8) 3(-7.85,0) 4(-7.85,0.8) 5(-7.85,1.6)
  rect 2.5x2 smd: 6(-7.75,4.45) 7(-1.996,4.45) 8(-7.75,-4.45) 9(-1.996,-4.45)
  round 0.6 hole 1.27 unplated: MH1(-5.25,2.2) MH2(-5.25,-2.2)
  silkscreen extent -9.68,-4.95 0.7,4.95
XTAL_US#1 [mil]
  round 50 hole 28: 1(0,0) 2(192.13,0)
  silkscreen extent -131,-98 323,98
XTAL_US#2 [mil]
  round 50 hole 28: 1(0,0) 2(192.13,0)
  rect 50x50 smd: ""(-130.32,0) ""(322.44,0)
  silkscreen extent -131,-98 323,98

## Part data
BAT: library part BAT
BOOT VOUT1 VOUT2: "Header, 3-Pin, Dual row", LatestRevisionDate=17-Jul-2002, LatestRevisionNote="Re-released for DXP Platform.", Publisher="Altium Limited"
C1 C2 C3 C4 C5 C6 C7 C8 C9 C10 C11 C12 C13 C14 C15 C16 C17 C18 C19 C20 C21 C22 C23 C24 C25 C26 C27 C28 C29 C30 C31 C32 C33 C34 C35 C36 C37 C38 C39 C40 C41 C42 C43 C45 C46 C48 C49 C50 C51 C52 C53 C54 C55 C56 C57 C59 C60 C62 C63 C64 C65 C66 C67 C68 C69 C71 C72 C73 C74 C75 C76 C77 C78 C79 C80 C81 C82 C83 C84 C85 C86 C87 C88 C89 C90 C91 C92 C93 C94 C95 C96 C97 C98 C99 C100 C101 C102 C103 C104 C105 C106: library part C
C44 C47 C58 C61 C70: library part CAP
CAN RS485: library part HEAD2
COM2 COM3: library part DB9
D1 D2 D4 D5 D8 D9: library part D
D3: library part ZMM3V6, "ZMM3V6"
D6 D7: library part SMBJ, "TVS"
DC_IN: library part POW
DS0 DS1 PWR: library part LED2, "Typical RED, GREEN, YELLOW, AMBER GaAs LED", PackageDocument=Feb-2002, LatestRevisionDate=17-Jul-2002, LatestRevisionNote="Re-released for DXP Platform.", PackageReference=3.2X1.6X1.1, Published=8-Jun-2000, Publisher="Altium Limited"
F1 R1 R2 R3 R4 R5 R6 R7 R8 R9 R10 R11 R12 R13 R14 R15 R16 R17 R18 R19 R20 R21 R22 R23 R24 R25 R26 R27 R28 R29 R30 R31 R32 R33 R34 R35 R36 R37 R38 R39 R40 R41 R42 R43 R44 R45 R46 R47 R48 R49 R50 R51 R52 R53 R54 R55 R56 R57 R58 R59 R60 R61 R62 R63 R64 R65 R66 R67 R68 R69 R70 R71 R72 R73 R74 R75 R76 R77 R78 R79 R80 R81 R82 R83: library part R
J1: library part HR911105
K1: "六脚波动开关"
KEY0 KEY1 KEY2 KEY_UP: library part KEY_M
L1: library part L_SOP
L2: library part L
LINE_IN: library part PHONE_M
LS1: "LIGHT SENS"
P3: library part "Header 16", "Header, 16-Pin", LatestRevisionDate=17-Jul-2002, LatestRevisionNote="Re-released for DXP Platform.", Publisher="Altium Limited"
P4: library part "Header 2X2", "Header, 2-Pin, Dual row", LatestRevisionDate=17-Jul-2002, LatestRevisionNote="Re-released for DXP Platform.", Publisher="Altium Limited"
P5 P11: library part "Header 2", "Header, 2-Pin", LatestRevisionDate=17-Jul-2002, LatestRevisionNote="Re-released for DXP Platform.", Publisher="Altium Limited"
P6: library part "Header 9X2", "Header, 9-Pin, Dual row", LatestRevisionDate=17-Jul-2002, LatestRevisionNote="Re-released for DXP Platform.", Publisher="Altium Limited"
P7 P8 P9: library part "Header 3X2", "Header, 3-Pin, Dual row", LatestRevisionDate=17-Jul-2002, LatestRevisionNote="Re-released for DXP Platform.", Publisher="Altium Limited"
P10: "Header, 4-Pin", LatestRevisionDate=17-Jul-2002, LatestRevisionNote="Re-released for DXP Platform.", Publisher="Altium Limited"
Q1 Q2: library part NPN, "8050/BCW846/BCW847"
Q3: library part PNP, "8550/BCW68"
SP+ SP-: library part TEST-POINT, "测试点"
U1: library part IS61LV51216
U3: library part MAX3232
U4: library part NRF24L01
U5: library part ATK-HC05, "ATK-HC05"
U6: library part DHT11, "数字温湿度传感器"
U7: library part MAX3485
U9: library part SN65HVD230D
U10: library part W25X16, "W25X16;SST25VF016;MX25L1605"
U11: library part 24C256
U12 U15: library part AMS1117
U13: "DC DC Step Down IC"
U14: "USB2UART"
U16: library part TDA1308
U17: library part HT6871, "HT6871"
U18: library part DM9000A
U19: library part VS1053
USB_232 USB_SLAVE: library part USB5
Y1 Y2 Y3 Y4 Y5: library part XTAL, "Crystal Oscillator", LatestRevisionDate=17-Jul-2002, LatestRevisionNote="Re-released for DXP Platform.", Published=8-Jun-2000, Publisher="Altium Limited"

## Via types
v1: diameter 0.61, hole 0.305, Top Layer to Bottom Layer, 291 vias
v2: diameter 3.58, hole 2.5, Top Layer to Bottom Layer, tented both sides, 4 vias

## Nets (pads, with @x,y where several pads share a name; then routed paths per layer and width w, separated by ;. In a path a pad name is that pad's centre, name@x,y a point inside that pad or via, vN(x,y) a via of type N, cw(c..) or ccw(c..) an arc to the next point about the centre after c; other vN are vias at no path point)
1WIRE_DQ: P2.12 R27.2 U2.126 U6.2 | length 40.2
  Top Layer w0.254: P2.12@34.112,39.497 35.357,40.742 55.46,40.742 U2.126@63.405,48.686 ; U6.2@77.978,3.937 79.184,2.73 R27.2@84.584,2.73
Aref: C68.2 C69.2 R57.2 R60.1 U16.3 U16.5 | length 22.3
  Top Layer w0.508: U16.3@136.591,50.648 139.37,50.648 140.64,49.378 U16.5@142.291,49.378 143.51,49.378 144.907,47.981 C68.2@147.88,47.981 C69.2@150.674,47.981 150.674,49.097 149.2,50.571 R60.1@149.2,50.927 147.523,50.927 146.685,50.089 R57.2@145.999,50.089
AVDD: C42.2 C91.2 C92.2 C93.2 R42.2 R71.2 U19.38 | length 18.4
  Top Layer w0.254: C91.2@120.752,30.861 v1(120.752,31.902) ; v1@120.752,32.055 121.85,33.154 U19.38@121.85,35.196 ; C92.2@124.055,30.861 v1(124.055,31.929) ; v1(127.406,31.902) 127.406,30.91 C93.2@127.357,30.861 R71.2@129.008,30.861
  Top Layer w0.508: R42.2@117.45,30.861 C42.2@119.101,30.861 C91.2@120.752,30.861
  Bottom Layer w0.254: v1(120.752,31.902) 120.778,31.929 v1(124.055,31.929) 127.38,31.929 v1(127.406,31.902)
BEEP: P2.2 R36.1 U2.139 | length 60.3
  Top Layer w0.254: R36.1@45.758,12.397 34.112,24.043 P2.2@34.112,26.797 35.306,27.991 51.902,27.991 U2.139@68.001,44.089
BOOT0: R11.2 R49.2 U2.138 | length 1
  Top Layer w0.254: R49.2@18.148,36.32 v1(18.148,37.3)
BOOT1: 2.4'/2.8'LCD.29 P1.33 R12.1 U2.48 | length 77.1
  Top Layer w0.254: U2.48@81.789,62.121 87.791,68.123 109.042,68.123 P1.33@110.236,66.929
  Bottom Layer w0.254: 2.4'/2.8'LCD.29@87.401,111.506 93.04,105.867 v1(93.04,68.174)
CAN_RX: P9.1 U9.4 | length 29
  Top Layer w0.254: U9.4@14.14,96.471 15.619,96.471 17.983,94.107 P9.1@17.983,69.952
CAN_TX: P9.2 U9.1 | length 33.7
  Top Layer w0.254: U9.1@14.14,100.281 15.365,100.281 15.951,99.695 15.951,99.309 16.002,99.258 16.002,98.196 20.523,93.675 P9.2@20.523,69.952
CH340_D+: U14.5 USB_232.3 | length 17.4
  Top Layer w0.254: USB_232.3@8.747,14.621 19.497,14.621 22.479,17.602 U14.5@22.479,20.006
CH340_D-: U14.6 USB_232.2 | length 17.9
  Top Layer w0.254: USB_232.2@8.747,15.421 v1(11.814,15.421) ; v1(23.673,18.186) 23.673,19.93 U14.6@23.749,20.006
  Bottom Layer w0.254: v1(11.814,15.421) 20.907,15.421 v1(23.673,18.186)
COM_RX: COM3.4 K1.4 | length 9.8
  Top Layer w0.254: COM3.4@36.932,109.804 36.932,105.083 39.878,102.136 K1.4@39.878,101.244
COM_TX: COM3.3 K1.3 | length 9.6
  Top Layer w0.254: COM3.3@34.163,109.804 34.163,103.784 K1.3@36.703,101.244
CVDD: C52.2 C53.2 C77.2 C78.2 C79.2 C80.2 U15.2 U15.4 U19.5 U19.7 U19.24 U19.31 | length 86.3
  Top Layer w0.254: C80.2@117.03,37.768 117.651,37.768 118.929,39.046 U19.31@120,39.046 ; C78.2@117.081,42.061 117.804,42.061 119.139,43.396 U19.24@121.35,43.396 ; U19.5@128.2,38.546 131.815,38.546 132.042,38.773 C79.2@132.042,39.473 131.969,39.546 U19.7@128.2,39.546
  Top Layer w0.508: C80.2@117.03,37.768 117.094,37.832 v1(117.094,38.76) ; C78.2@117.081,42.061 117.094,42.073 v1(117.094,43.104) ; C79.2@132.042,39.473 132.042,40.399 v1(132.232,40.589) ; v1(132.283,54.866) C77.2@135.852,54.866 135.852,56.883 136.677,57.709 C53.2@137.922,57.709 137.922,58.877 138.316,59.271 C52.2@138.316,59.996 138.316,61.1 137.592,61.824 U15.4@137.592,64.77 U15.2@143.688,64.77
  Bottom Layer w0.508: v1(117.094,38.76) v1(117.094,43.104) 117.094,53.01 118.95,54.866 v1(132.283,54.866) 132.158,54.866 132.158,40.664 v1(132.232,40.589)
DM9000_INT: D9.1 P2.34 R16.1 U2.91 | length 47.7
  Top Layer w0.254: R16.1@9.576,93.726 10.566,93.726 v1(10.643,93.802) ; P2.34@34.112,67.437 35.306,68.631 v1(47.092,68.631) 59.016,68.631 U2.91@63.405,64.242 ; D9.1@47.066,83.591 47.066,82.398 v1(47.092,82.372)
  Bottom Layer w0.254: v1(47.092,68.631) v1(47.092,82.372)
DM9000_RST: P2.15 R62.1 U2.123 U7.2 U18.40 | length 141.1
  Top Layer w0.254: P2.15@36.652,44.577 57.175,44.577 U2.123@62.344,49.746 63.474,50.876 65.303,50.876 69.139,47.041 v1(71.679,47.041) ; v1(100.076,51.841) v1(100.076,54.026) ; v1(111.252,83.947) 116.484,78.715 R62.1@117.627,78.715 ; U18.40@120.463,88.968 120.463,79.442 119.736,78.715 R62.1@117.627,78.715 ; U7.2@123.495,77.114 118.085,77.114 117.627,77.572 R62.1@117.627,78.715
  Bottom Layer w0.254: v1(71.679,47.041) 72.362,47.041 73.073,46.33 73.612,46.33 80.064,39.878 84.487,39.878 84.639,39.726 87.96,39.726 v1(100.076,51.841) ; v1(100.076,54.026) 100.076,73.316 107.318,80.558 107.634,80.558 111.023,83.947 v1(111.252,83.947)
F_CS: P1.44 U2.73 U10.1 | length 46.3
  Top Layer w0.254: U2.73@69.768,70.606 68.605,71.769 68.605,75.692 72.532,79.618 P1.44@107.707,79.618
FIFO_OE: P2.8 P6.7 U2.132 | length 36.7
  Top Layer w0.254: P2.8@34.112,34.417 35.306,35.611 42.672,35.611 43.036,35.247 54.209,35.247 U2.132@65.526,46.564
FIFO_RCLK: JTAG.3 P2.6 P6.16 R5.2 U2.134 | length 43.1
  Top Layer w0.254: JTAG.3@6.096,43.434 7.441,42.089 R5.2@10.706,42.089 ; P2.6@34.112,31.877 34.315,31.877 35.56,33.122 53.497,33.122 U2.134@66.233,45.857
FIFO_RRST: P2.9 P6.5 U2.129 | length 32.2
  Top Layer w0.254: P2.9@36.652,36.957 45.542,36.957 47.288,38.703 55.543,38.703 U2.129@64.465,47.625
FIFO_WEN: JTAG.13 P2.7 P6.18 R10.2 U2.133 | length 40.9
  Top Layer w0.254: JTAG.13@6.096,56.134 10.706,51.524 R10.2@10.706,51.233 ; P2.7@36.652,34.417 54.086,34.417 U2.133@65.879,46.211
FIFO_WRST: P2.16 P6.3 U2.122 | length 30.6
  Top Layer w0.254: P2.16@34.112,44.577 35.382,45.847 52.426,45.847 52.959,45.314 57.204,45.314 U2.122@61.99,50.1
FSMC_A0: P1.10 U1.24 U2.10 | length 108.1
  Top Layer w0.254: v1(51.435,102.337) 51.52,102.252 U1.24@53.242,102.252 ; v1(71.247,50.8) 71.247,50.749 76.486,45.51 U2.10@76.486,45.504 78.632,43.358 92.812,43.358 99.72,36.449 P1.10@107.696,36.449
  Bottom Layer w0.254: v1(51.435,102.337) 58.318,102.337 58.674,101.981 58.674,88.093 70.155,76.612 70.155,51.841 71.196,50.8 v1(71.247,50.8)
FSMC_A1: P1.9 U1.1 U2.11 | length 97
  Top Layer w0.254: U1.1@65.242,86.252 66.808,86.252 v1(66.853,86.208) ; v1(72.492,50.648) 72.492,50.205 U2.11@76.84,45.857 78.958,43.739 92.969,43.739 99.04,37.668 109.017,37.668 P1.9@110.236,36.449
  Bottom Layer w0.254: v1(66.853,86.208) 78.105,86.208 80.899,83.414 80.899,59.207 72.492,50.8 v1(72.492,50.648)
FSMC_A2: P1.12 U1.2 U2.12 | length 93.4
  Top Layer w0.254: U1.2@65.242,87.052 67.672,87.052 v1(67.716,87.097) ; v1(73.406,50.698) 73.406,49.998 U2.12@77.193,46.211 79.284,44.12 93.127,44.12 98.258,38.989 P1.12@107.696,38.989
  Bottom Layer w0.254: v1(67.716,87.097) 78.003,87.097 81.28,83.82 81.28,58.496 73.482,50.698 v1(73.406,50.698)
FSMC_A3: P1.11 U1.3 U2.13 | length 95.9
  Top Layer w0.254: U1.3@65.242,87.852 66.846,87.852 v1(66.853,87.859) ; v1(74.422,50.622) 74.422,49.649 77.506,46.564 U2.13@77.547,46.564 79.61,44.501 93.285,44.501 97.628,40.157 109.068,40.157 P1.11@110.236,38.989
  Bottom Layer w0.254: v1(66.853,87.859) 78.283,87.859 81.661,84.48 81.661,57.897 74.93,51.166 74.93,51.13 v1(74.422,50.622)
FSMC_A4: P1.14 U1.4 U2.14 | length 92.3
  Top Layer w0.254: U1.4@65.242,88.652 67.697,88.652 v1(67.716,88.671) ; v1(75.311,49.55) 75.311,49.53 77.9,46.941 U2.14@77.9,46.918 79.936,44.882 93.443,44.882 96.796,41.529 P1.14@107.696,41.529
  Bottom Layer w0.254: v1(67.716,88.671) 78.334,88.671 82.042,84.963 82.042,57.74 75.311,51.009 v1(75.311,49.55)
FSMC_A5: P1.13 U1.5 U2.15 | length 95
  Top Layer w0.254: U1.5@65.242,89.452 66.783,89.452 v1(66.802,89.433) ; v1(76.048,50.546) 76.048,49.478 U2.15@78.254,47.271 80.262,45.263 93.601,45.263 96.191,42.672 109.093,42.672 P1.13@110.236,41.529
  Bottom Layer w0.254: v1(66.802,89.433) 78.486,89.433 82.423,85.496 82.423,57.582 76.048,51.206 v1(76.048,50.546)
FSMC_A6: P1.35 U1.23 U2.50 | length 98
  Top Layer w0.254: v1(50.825,103.099) 50.872,103.052 U1.23@53.242,103.052 ; v1(79.9,61.646) U2.50@81.082,62.828 88.155,69.901 93.624,69.901 94.31,70.587 109.118,70.587 P1.35@110.247,69.458
  Bottom Layer w0.254: v1(50.825,103.099) 58.141,103.099 59.08,102.159 59.08,88.225 70.536,76.77 70.536,65.456 74.346,61.646 v1(79.9,61.646)
FSMC_A7: P1.38 U1.22 U2.53 U18.32 | length 118.7
  Top Layer w0.254: U1.22@65.242,103.052 90.039,103.052 v1(90.068,103.022) ; U2.53@80.022,63.888 88.131,71.998 P1.38@107.707,71.998 ; v1(90.018,84.226) 90.018,83.998 89.865,84.15 102.845,84.15 v1(103.962,85.268) ; v1(108.026,89.51) 110.834,92.318 U18.32@117.613,92.318
  Bottom Layer w0.254: v1(90.068,71.882) v1(90.068,103.022) ; v1(103.962,85.268) 103.962,85.446 107.34,88.824 107.343,88.824 108.026,89.507 v1(108.026,89.51)
FSMC_A8: P1.37 U1.21 U2.54 | length 87.9
  Top Layer w0.254: U1.21@65.242,102.252 89.222,102.252 v1(89.256,102.286) ; U2.54@79.668,64.242 88.73,73.304 108.839,73.304 110.145,71.998 P1.37@110.247,71.998
  Bottom Layer w0.254: v1(89.256,102.286) 89.256,73.431 v1(89.332,73.355)
FSMC_A9: P1.40 U1.20 U2.55 | length 85.2
  Top Layer w0.254: U1.20@65.242,101.452 90.886,101.452 v1(90.932,101.498) ; U2.55@79.314,64.596 89.257,74.538 P1.40@107.707,74.538
  Bottom Layer w0.254: v1(90.932,74.473) v1(90.932,101.498)
FSMC_A10: 2.4'/2.8'LCD.2 P1.39 U1.19 U2.56 | length 111.3
  Top Layer w0.254: v1(63.602,101.397) 64.346,100.652 U1.19@65.242,100.652 91.584,100.652 v1(91.618,100.686) ; U2.56@78.961,64.949 89.729,75.717 109.068,75.717 P1.39@110.247,74.538
  Bottom Layer w0.254: 2.4'/2.8'LCD.2@51.841,114.046 52.984,115.189 54.427,115.189 57.709,111.907 57.709,105.435 61.011,102.133 62.865,102.133 v1(63.602,101.397) ; v1(91.618,100.686) 91.618,75.819 v1(91.694,75.743)
FSMC_A11: P1.42 U1.18 U2.57 | length 83.9
  Top Layer w0.254: U1.18@65.242,99.852 92.375,99.852 v1(92.38,99.847) ; U2.57@78.607,65.303 90.383,77.078 P1.42@107.707,77.078
  Bottom Layer w0.254: v1(92.38,77.064) v1(92.38,99.847)